# EAGLE board MicroMouseMain (EAGLE 9.6.2)
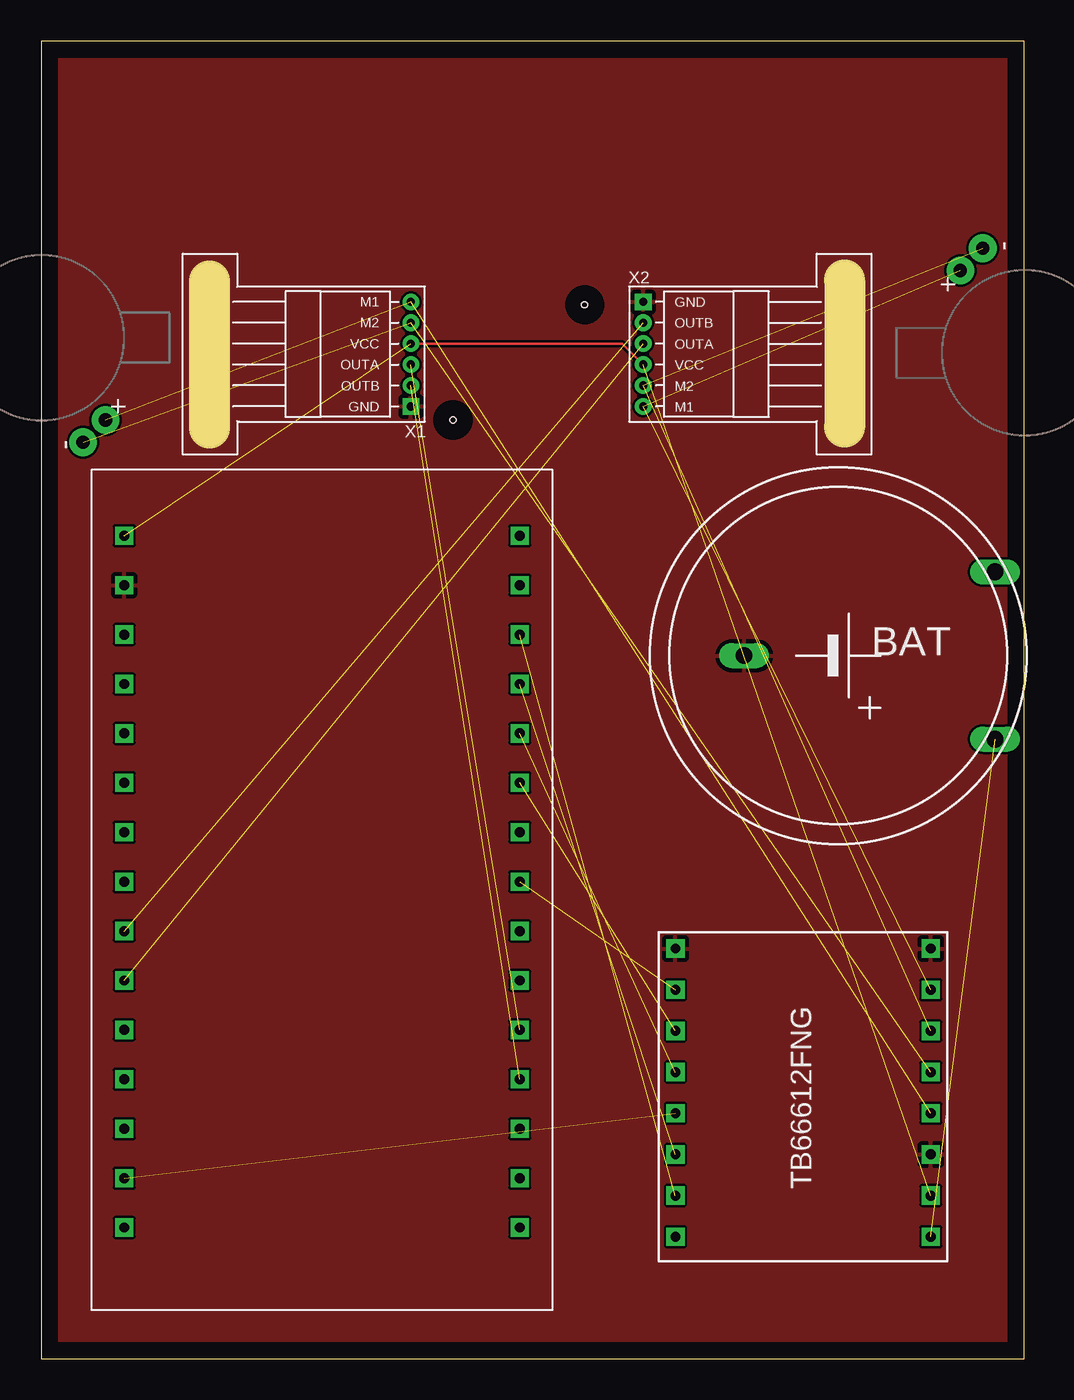
[diagram p0: board, top side]

Size 59.67 x 80 mm. Coordinates in mm from the lower left corner, seen from the top.
Outline: 0,0 59.67,0 59.67,80 0,80 0,0
Copper layers (1*16): Top 0.035mm / dielectric 1.5mm / Bottom 0.035mm
Design rules "default": minimum track width 6mil, minimum drill 0.35mm, track to track 6mil, track to pad 6mil, pad to pad 6mil, via to via 6mil, smd to smd 6mil, copper to edge 40mil, drill to drill 6mil, minimum pad ring 10mil, minimum via ring 8mil, stop-mask expansion 4mil, vias tented up to drill 0mil, thermal gap 10mil
Holes 0.35 mm at 25,57 33,64

## Footprints (pad centres in the part's own frame; a part is rotated, then mirrored left to right if it is on the bottom)
BATTERY = drill 1.016 long: + 9.525,-5.08; +@1 9.525,5.08; - -5.715,0
VIBE-MOTOR-10MM = drill 0.8 pad 1.676: + -5,-3.9; - -6.35,-2.54
TB66612FNG = drill 0.6 square: A01 9,1; A02 11.5,1; AIN1 4,16.5; AIN2 6.5,16.5; B01 16.5,1; B02 14,1; BIN1 11.5,16.5; BIN2 14,16.5; GND 6.5,1; GND2 19,1; GND3 19,16.5; PWMA 1.5,16.5; PWMB 16.5,16.5; STBY 9,16.5; VCC 4,1; VM 1.5,1
ESP-WROOM-32-WOBLE = drill 0.6 square: 3V3 2,47; D2 2,38; D4 2,35; D5 2,26; D12 26,38; D13 26,41; D14 26,35; D15 2,41; D18 2,23; D19 2,20; D21 2,17; D22 2,8; D23 2,5; D25 26,26; D26 26,29; D27 26,32; D32 26,20; D33 26,23; D34 26,14; D35 26,17; EN 26,5; GND 2,44; GND2 26,44; RX0 2,14; RX2 2,32; TX0 2,11; TX2 2,29; VIN 26,47; VN 26,11; VP 26,8
ENCODER_2591_THT = drill 0.5 pad 0.813 square: GND -4.445,3.175 | drill 0.5 pad 0.813: M1 -4.445,-3.175; M2 -4.445,-1.905; OUTA -4.445,0.635; OUTB -4.445,1.905; VCC -4.445,-0.635

## Placement (x,y rotation side)
BAT  7.4V  [BATTERY]  48.39,42.7 0 top
LEFT  MOTOR10MM  [VIBE-MOTOR-10MM]  0,62 90 top
RIGHT  MOTOR10MM  [VIBE-MOTOR-10MM]  59.71,61.08 270 top
U$1  TB66612FNG  [TB66612FNG]  55.01,5.91 90 top
U$2  ESP-WROOM-32-WOBLE  [ESP-WROOM-32-WOBLE]  3.05,2.97 0 top
X1  ENCODER_2591ENCODER_2591_THT  [ENCODER_2591_THT]  18,61 180 top
X2  ENCODER_2591ENCODER_2591_THT  [ENCODER_2591_THT]  41,61 0 top

## Library data of the parts
BAT = special
LEFT RIGHT = SparkFun-Electromechanical; PROD_ID: COMP-08572; SF_SKU: ROB-08449
U$1 = TB66612FNG
U$2 = ESP-WROOM-32-WOBLE
X1 X2 = Pololu Encoder and Motor Driver

## Nets
+: BAT.+@1
A01: LEFT.+ U$1.A01 X1.M1
A02: LEFT.- U$1.A02 X1.M2
AIN1: U$1.AIN1 U$2.D13
AIN2: U$1.AIN2 U$2.D12
B01: RIGHT.+ U$1.B01 X2.M1
B02: RIGHT.- U$1.B02 X2.M2
BAT: BAT.+ U$1.VM
BIN1: U$1.BIN1 U$2.D14
BIN2: U$1.BIN2 U$2.D27
C1L: U$2.D35 X1.OUTA
C1R: U$2.D19 X2.OUTA
C2L: U$2.D34 X1.OUTB
C2R: U$2.D18 X2.OUTB
D32: U$2.D32
D33: U$2.D33
GND: BAT.- U$1.GND U$1.GND2 U$1.GND3 U$2.GND X1.GND X2.GND
PWMB: U$1.PWMA
PWML: U$1.PWMB U$2.D25
PWMR: U$2.D26
STBY: U$1.STBY U$2.D22
VCC: U$1.VCC U$2.3V3 X1.VCC X2.VCC

## Tracks (layer width: path | path; a pad name or v marks a point on that pad's centre or on a via)
A01  (2 unrouted)
A02  (2 unrouted)
AIN1  (1 unrouted)
AIN2  (1 unrouted)
B01  (2 unrouted)
B02  (2 unrouted)
BAT  (1 unrouted)
BIN1  (1 unrouted)
BIN2  (1 unrouted)
C1L  (1 unrouted)
C1R  (1 unrouted)
C2L  (1 unrouted)
C2R  (1 unrouted)
GND
  pour Top: -1,81 -1,-1 61,-1 61,81
PWML  (1 unrouted)
STBY  (1 unrouted)
VCC  (2 unrouted)
  Top 0.152: X1.VCC 35.28,61.63 X2.VCC